# Altium PCB DAB_PCB.PcbDoc
Units mil, origin at the board's own origin, x right, y up, seen from the top; angles counter-clockwise.
Board outline 9448.82 x 7874.02 mil, 2 copper layers (Top Layer, Bottom Layer); 32 components, 34 nets, 127 pads, 0 vias.
Unrouted connection lines stored in the file: 12.
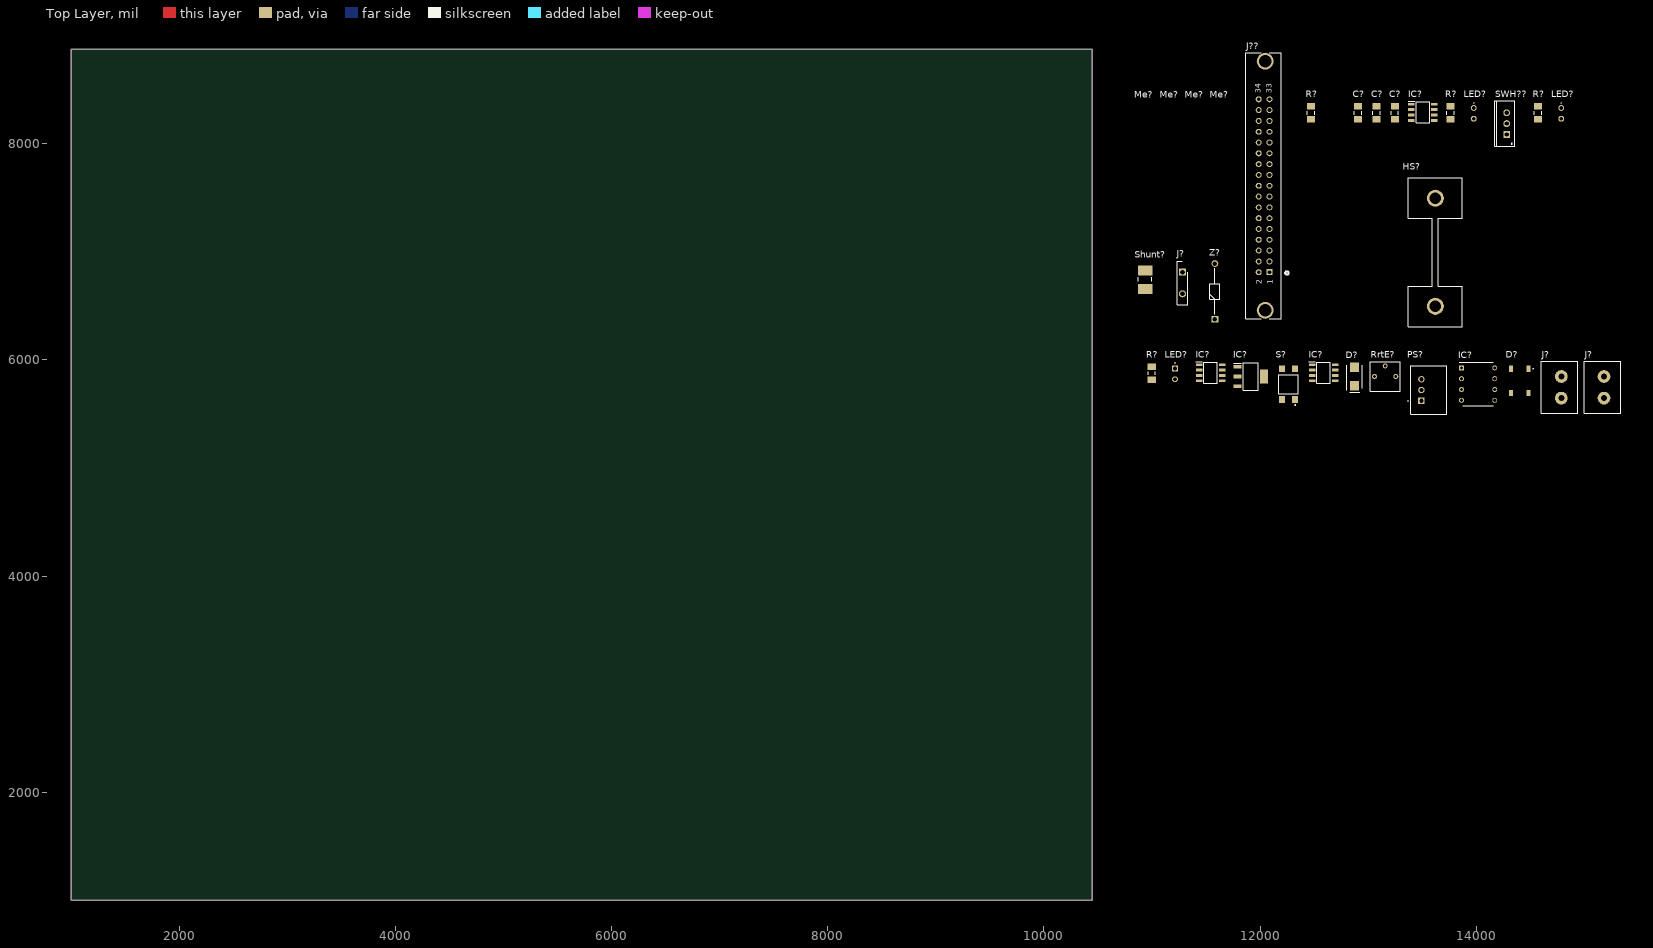
[diagram p0: Top Layer view]
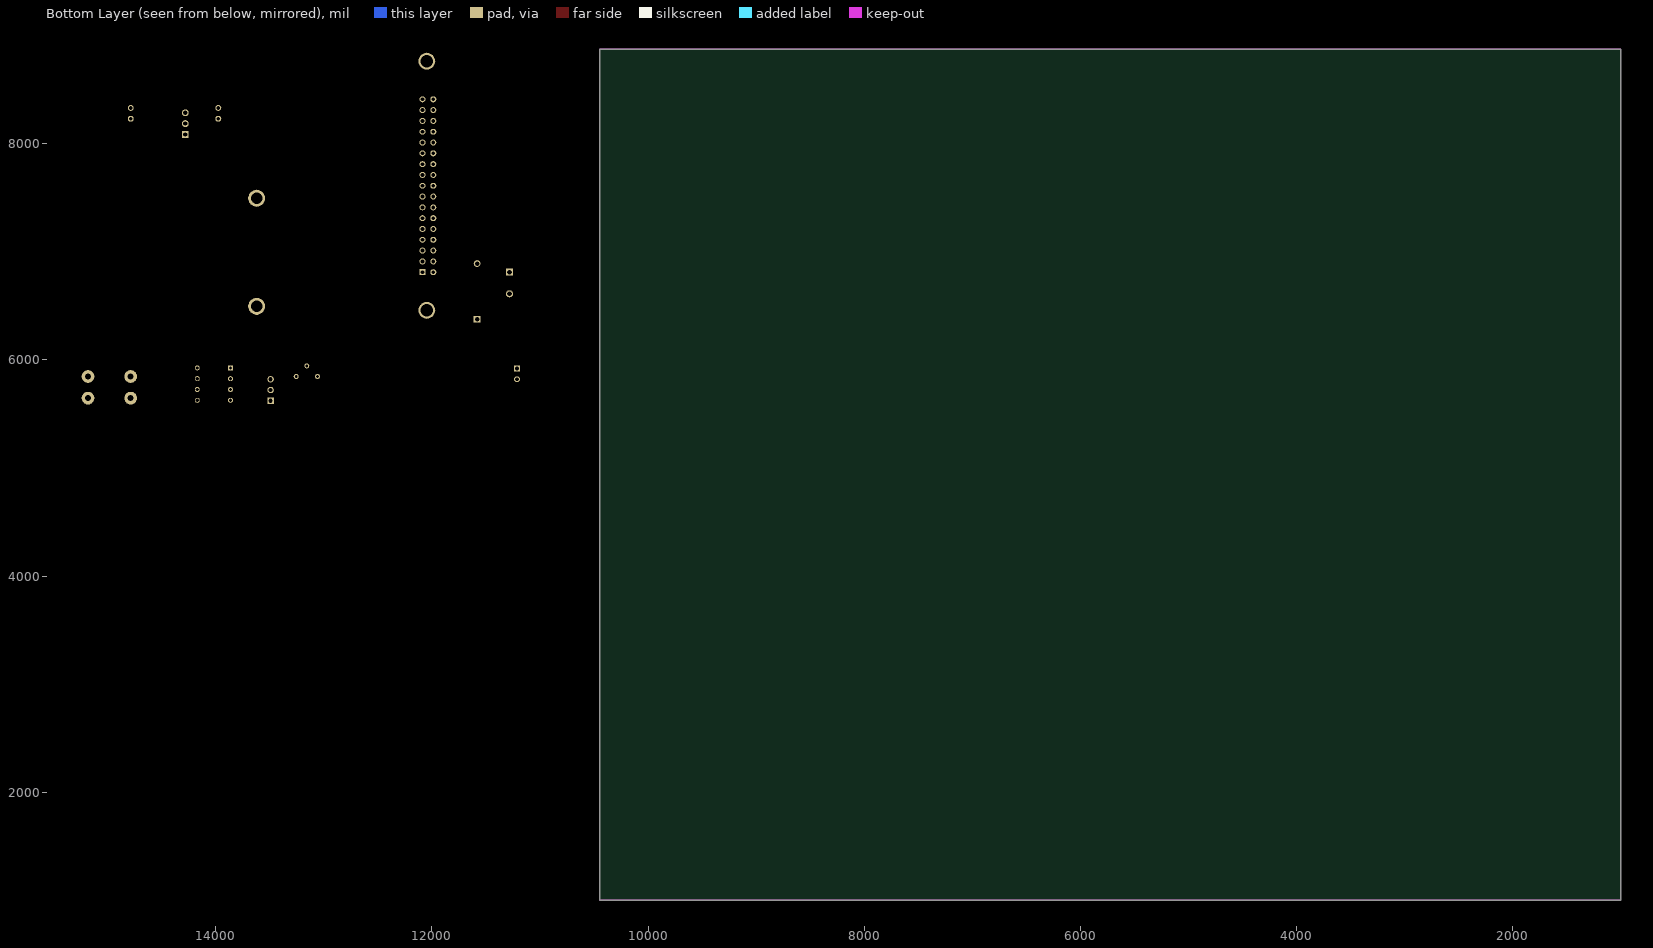
[diagram p1: Bottom Layer view, seen from below]

## Layer stack, top to bottom
Top Solder: solder mask 0.4, Solder Resist, Dk 3.5
Top Layer: signal copper 1.4
Dielectric 1: dielectric 12.6, FR-4, Dk 4.8
Bottom Layer: signal copper 1.4
Bottom Solder: solder mask 0.4, Solder Resist, Dk 3.5

## Board outline
1000,1000 1000,8874.02 10448.82,8874.02 10448.82,1000

## Design rules (kind name [scope] priority, off if disabled: settings)
BoardOutlineClearance [All] p1: gap=7.87 ignorepadtopadclearanceinfootprint=FALSE
Clearance [All] p1: gap=13.78 ignorepadtopadclearanceinfootprint=TRUE
ComponentClearance [All] p1: gap=5 collisioncheckmode=3 verticalgap=5 showdistances=TRUE
DiffPairsRouting [All] p1: maxlimit=10 minlimit=5 mostfreqgap=5 toplayer_minwidth=5 toplayer_maxwidth=1000 toplayer_prefwidth=5 bottomlayer_minwidth=5 bottomlayer_maxwidth=1000 bottomlayer_prefwidth=5 maxuncoupledlength=500
Height [All] p1: minheight=0 maxheight=71497.94 prefheight=500
HoleSize [All] p1: absolutevalues=TRUE maxlimit=248.03 minlimit=11.81 maxpercent=80.000 minpercent=20.000
HoleToHoleClearance [All] p1: gap=10 allowstackedmicrovias=FALSE
MinimumAnnularRing [All] p1: minimumring=6
MinimumSolderMaskSliver [All] p1: minsoldermaskwidth=6
PlaneClearance [All] p1: clearance=5
PlaneConnect PlaneConnectPowerPads [InPadClass('PowerPads')] p1: planeconnectstyle=Direct reliefexpansion=20 reliefentries=4 reliefconductorwidth=10 reliefairgap=10
PlaneConnect [All] p2: pad.planeconnectstyle=Relief pad.reliefexpansion=11.81 pad.reliefentries=4 pad.reliefconductorwidth=5 pad.reliefairgap=5 via.planeconnectstyle=Direct via.reliefexpansion=11.81 via.reliefentries=4 via.reliefconductorwidth=5 via.reliefairgap=5
PolygonConnect PolygonConnectPowerPads [All vs (InPadClass('PowerPads'))] p1: connectstyle=Direct reliefconductorwidth=10 reliefentries=4 polygonreliefangle="90 Angle" airgapwidth=10
PolygonConnect [All] p2: thpad.connectstyle=Relief thpad.reliefconductorwidth=5 thpad.reliefentries=4 thpad.polygonreliefangle="90 Angle" thpad.airgapwidth=5 smdpad.connectstyle=Relief smdpad.reliefconductorwidth=5 smdpad.reliefentries=4 smdpad.polygonreliefangle="90 Angle" smdpad.airgapwidth=5 via.connectstyle=Direct via.reliefconductorwidth=5 via.reliefentries=4 via.polygonreliefangle="90 Angle" via.airgapwidth=5
RoutingVias [All] p1: holewidth=11.81 width=23.62 viastyle="Through Hole" minholewidth=11.81 minwidth=23.62 maxholewidth=23.62 maxwidth=259.84
SilkToSilkClearance [All] p1: silktosilkclearance=5
SilkToSolderMaskClearance [IsPad] p1: minsilkscreentomaskgap=5 clearancetoexposedcopper=TRUE
SolderMaskExpansion [All] p1: expansion=2 istentingtop=FALSE
UnRoutedNet [All] p1: checkbadconnections=TRUE
Width [All] p1: maxlimit=1000 minlimit=10 preferedwidth=10 minimp=50.000000 maximp=50.000000 favimp=50.000000
19 further rules are at their usual default settings.

## Classes and differential pairs
component class DAB_Schematic: C? D? HS? IC? J? J?? LED? Me? PS? R? RrtE? S? Shunt? SWH?? Tr? Z?

## Components (designator, comment, footprint, x,y, rotation, side; value= is the part's Value field where it differs from the comment)
C? "Put Value Here!" SM/1206 13247.28,8287.17 r90 top
C? "1uF" SM/1206 13077.28,8287.17 r90 top
C? "1uF" SM/1206 12907.28,8287.17 r90 top
D? "ES2C" DIOM5436X244N 12872.99,5846.73 r90 top
D? "LMB14S-TP" LMB14STP 14402.99,5806.73 r0 top
HS? "Heatsink" "Heatsink EA-T220" 13622.28,6496.54 r90 top
IC? "MCP6241-E_P" DIP781W56P254L950H533Q8N 14017.99,5776.73 r0 top
IC? "INA201AID" SOIC127P600X175-8N 12587.99,5881.73 r0 top
IC? "AZ1117IH-3.3TRG1" SOT230P700X180-4N 11912.99,5846.73 r0 top
IC? "UCC27288DR" SOIC127P600X175-8N 13507.28,8292.17 r0 top
IC? "UA78L12ACDR" SOIC127P600X175-8N 11542.99,5881.73 r0 top
J? "test point" "test point" 11282.28,6812.17 r90 top
J? "" "PHOENIX  1755736" 15182.99,5846.73 r90 top
J? "" "PHOENIX  1755736" 14787.99,5846.73 r90 top
J?? "N3431-6302RB" 3M_N3431-6302RB 11987.28,8412.17 r90 top
LED? "WP710A10LGD" WP710A10LGD 14787.28,8332.17 r0 top
LED? "WP710A10LID" WP710A10LID 11212.99,5921.73 r0 top
LED? "WP710A10LGD" WP710A10LGD 13977.28,8332.17 r0 top
Me? "M3-Hole" M3 11132.28,8327.17 r0 top
Me? "M3-Hole" M3 11362.28,8327.17 r0 top
Me? "M3-Hole" M3 11592.28,8327.17 r0 top
Me? "M3-Hole" M3 10897.28,8327.17 r0 top
PS? "173951275" 173951275 13492.99,5621.73 r90 top
R? "Put Value here!" SM/1206 14572.28,8287.17 r90 top
R? "Put Value here!" SM/1206 12472.28,8287.17 r90 top
R? "Put Value here!" SM/1206 13762.28,8287.17 r90 top
R? "Put Value here!" SM/1206 10997.99,5876.73 r90 top
RrtE? "Variable Resistor" "TRIMMER CT-6EP" 13157.99,5846.73 r0 top
S? "TL3305BF100QG" TL3305BF160QG 12262.99,5776.73 r90 top
Shunt? "Put Value Here!" CSNL2512FT5L00 10937.28,6742.17 r90 top
SWH?? "Put MOSFET Part Number Here!" TO-220AB 14282.28,8187.17 r90 top
Z? "1N4750A-TR" DIOAD1310W86L370D235 11582.28,6376.42 r90 top

## Footprints (in the part's own frame and the unit in brackets; to place one, negate y for a bottom-side part, rotate by r counter-clockwise, add the part's x,y. Pads: shape width x height; smd on the part's side, far side on the other; paste and mask are expansions set on the pad)
3M_N3431-6302RB [mil]
  rect 55x55 hole 35 mask+4.02: 1(-1600,-100)
  round 55 hole 35 mask+4.02: 2(-1600,0) 3(-1500,-100) 4(-1500,0) 5(-1400,-100) 6(-1400,0) 7(-1300,-100) 8(-1300,0) 9(-1200,-100) 10(-1200,0) 11(-1100,-100) 12(-1100,0) 13(-1000,-100) 14(-1000,0) 15(-900,-100) 16(-900,0) 17(-800,-100) 18(-800,0) 19(-700,-100) 20(-700,0) 21(-600,-100) 22(-600,0) 23(-500,-100) 24(-500,0) 25(-400,-100) 26(-400,0) 27(-300,-100) 28(-300,0) 29(-200,-100) 30(-200,0) 31(-100,-100) 32(-100,0) 33(0,-100) 34(0,0)
  round 156 hole 116 mask+4.02: 35(-1953,-60) 36(353,-60)
  silkscreen extent -2032,-276 432,120, body extent -2030,-215 430,125, height 1069
173951275 [mm]
  rect 1.5x1.5 hole 1: 1(0,0)
  round 1.5 hole 1: 2(2.54,0) 3(5.08,0)
  silkscreen extent -3.21,-6 8.29,3.2, body extent -3.21,-6.5 8.29,2.5, height 17.5
CSNL2512FT5L00 [mm]
  rect 2.38x3.4 smd: 1(-2.21,0) 2(2.21,0)
  silkscreen extent -0.3,-1.59 0.6,1.59, body extent -3.17,-1.59 3.18,1.59, height 0.35
DIOAD1310W86L370D235 [mm]
  rect 1.575x1.575 hole 1.05: 1(0,0)
  round 1.575 hole 1.05: 2(13.1,0)
  silkscreen extent 1.14,-1.17 11.96,1.17, body extent -0.43,-1.29 13.53,1.29, height 2.6
DIOM5436X244N [mm]
  rect 2.2x2.15 smd: 1(-2.2,0) 2(2.2,0)
  silkscreen extent -3.68,-1.81 2.7,1.81, body extent -2.7,-1.81 2.7,1.81, height 2.31
DIP781W56P254L950H533Q8N [mm]
  rect 1.159x1.159 hole 0.759: 1(-3.905,3.81)
  round 1.159 hole 0.759: 2(-3.905,1.27) 3(-3.905,-1.27) 4(-3.905,-3.81) 5(3.905,-3.81) 6(3.905,-1.27) 7(3.905,1.27) 8(3.905,3.81)
  silkscreen extent -4.48,-5.08 3.56,5.08, body extent -4.05,-4.75 4.05,4.75, height 5.33
"Heatsink EA-T220" [mm]
  round 4.005 hole 2.67: 1(0,0) 2(25.4,0)
  silkscreen extent -4.8,-6.35 30.2,6.35, body extent -4.8,-6.35 30.2,6.35, height 38.45
LMB14STP [mm]
  rect 0.9x1.5 smd: 1(2.05,2.86) 2(2.05,-2.86) 3(-2.05,-2.86) 4(-2.05,2.86)
  silkscreen extent 3.1,2.81 3.2,2.91
M3 [mil] "M3 - Hole"
  round 60 hole 129.92: ""(0,0)
"PHOENIX  1755736" [mm]
  round 3 hole 1.4: 1(0,0) 2(-5.08,0)
  silkscreen extent -8.62,-3.9 3.54,4.7, body extent -8.64,-3.92 3.52,4.68, height 12.01
SM/1206 [mm]
  rect 1.5x1.9 smd: 1(-1.55,0) 2(1.55,0)
  silkscreen extent -0.4,-0.85 0.4,0.85, body extent -1.68,-0.87 1.68,0.87, height 0.71
SOIC127P600X175-8N [mm]
  rect 1.525x0.65 smd: 1(-2.712,1.905) 2(-2.712,0.635) 3(-2.712,-0.635) 4(-2.712,-1.905) 5(2.712,-1.905) 6(2.712,-0.635) 7(2.712,0.635) 8(2.712,1.905)
  silkscreen extent -3.47,-2.45 1.6,2.58, body extent -3,-2.45 3,2.45, height 1.75
SOT230P700X180-4N [mm]
  rect 1.85x0.9 smd: 1(-3.1,2.3) 2(-3.1,0) 3(-3.1,-2.3)
  rect 1.85x3.2 smd: 4(3.1,0)
  silkscreen extent -4.03,-3.25 1.75,3.25, body extent -3.5,-3.25 3.5,3.25, height 1.8
"test point" [mm]
  rect 1.65x1.65 hole 1.1: 1(0,0)
  round 1.65 hole 1.1: 2(-5.08,0)
  silkscreen extent -7.62,-1.27 2.54,1.27, body extent -7.62,-1.27 2.54,1.27, height 8.38
TL3305BF160QG [mm]
  rect 1.6x1.4 smd: 1(-3.6,-1.5) 2(3.6,-1.5) 3(-3.6,1.5) 4(3.6,1.5)
  silkscreen extent -5,-2.25 2.25,2.25, body extent -3.75,-2.25 3.75,2.25, height 4.9
TO-220AB [mm]
  rect 1.6x1.6 hole 1: 1(-2.54,0)
  round 1.6 hole 1: 2(0,0) 3(2.54,0)
  silkscreen extent -5.35,-1.85 5.35,2.85, body extent -5.4,-1.9 5.4,2.9, height 19.3
"TRIMMER CT-6EP" [mm]
  round 1.15 hole 0.65: 1(-2.5,0) 2(0,2.5) 3(2.5,0)
  silkscreen extent -3.5,-3.5 3.5,3.5
WP710A10LGD [mm]
  round 1.4 hole 0.9: 1(0,0) 2(0,-2.54)
  silkscreen extent -0.05,1.13 0.05,1.23, body extent -1.6,-2.89 1.6,0.35, height 6
WP710A10LID [mm]
  rect 1.4x1.4 hole 0.9: 1(0,0)
  round 1.4 hole 0.9: 2(0,-2.54)
  silkscreen extent -0.05,1.2 0.05,1.3, body extent -1.6,-2.89 1.6,0.35, height 6

## Part data
C? C? C?: library part "Capacitor (SMD)", "Capacitor (non polarized)"
D?: library part "Schottky Diode", "Schottky Diode"
D?: "Schottky Diode", Manufacturer_Name=MCC, Mouser Part Number=833-LMB14S-TP, Arrow Part Number=LMB14S-TP, Arrow Price/Stock=https://www.arrow.com/en/products/lmb14s-tp/micro-commercial-components, Datasheet Link=https://www.mccsemi.com/pdf/Products/LMB12S-LMB110S(LMBS-1).pdf, Height=1.71mm, Manufacturer_Part_Number=LMB14S-TP, Mouser Price/Stock=https://www.mouser.co.uk/ProductDetail/Micro-Commercial-Components-MCC/LMB14S-TP?qs=P1JMDcb91o681gFxLNJ1UQ%3D%3D
HS?: "HEATSINK TO-218,TO-220,TO-247"
IC?: "Integrated Circuit", Arrow Part Number=MCP6241-E/P, Manufacturer_Name=Microchip, Mouser Part Number=579-MCP6241-E/P, Arrow Price/Stock=https://www.arrow.com/en/products/mcp6241-ep/microchip-technology?utm_currency=USD&region=nac, Datasheet Link=http://ww1.microchip.com/downloads/en/DeviceDoc/21882d.pdf, Height=5.334mm, Manufacturer_Part_Number=MCP6241-E/P, Mouser Price/Stock=https://www.mouser.co.uk/ProductDetail/Microchip-Technology/MCP6241-E-P?qs=g6BBfX6YTkkJAE8LlpYY9A%3D%3D
IC?: "Integrated Circuit", Manufacturer_Name="Texas Instruments", Mouser Part Number=595-INA201AID, Arrow Part Number=INA201AID, Arrow Price/Stock=https://www.arrow.com/en/products/ina201aid/texas-instruments?utm_currency=USD&region=nac, Datasheet Link=http://www.ti.com/lit/gpn/INA201, Height=1.75mm, Manufacturer_Part_Number=INA201AID, Mouser Price/Stock=https://www.mouser.co.uk/ProductDetail/Texas-Instruments/INA201AID?qs=wkx8pu8tL7JUWgtgkwU%252B9A%3D%3D
IC?: "Integrated Circuit", Manufacturer_Name="Diodes Incorporated", Mouser Part Number=621-AZ1117IH-3.3TRG1, Arrow Part Number=AZ1117IH-3.3TRG1, Arrow Price/Stock=https://www.arrow.com/en/products/az1117ih-3.3trg1/diodes-incorporated?utm_currency=USD&region=europe, Datasheet Link=https://www.diodes.com//assets/Datasheets/AZ1117I.pdf, Height=1.8mm, Manufacturer_Part_Number=AZ1117IH-3.3TRG1, Mouser Price/Stock=https://www.mouser.co.uk/ProductDetail/Diodes-Incorporated/AZ1117IH-3.3TRG1?qs=cpo3%2FpBou2jnS4SxLgAVoA%3D%3D
IC?: "Integrated Circuit", Manufacturer_Name="Texas Instruments", Mouser Part Number=595-UCC27288DR, Arrow Part Number=UCC27288DR, Arrow Price/Stock=https://www.arrow.com/en/products/ucc27288dr/texas-instruments?utm_currency=USD&region=europe, Datasheet Link=https://www.arrow.com/en/products/ucc27288dr/texas-instruments, Height=1.75mm, Manufacturer_Part_Number=UCC27288DR, Mouser Price/Stock=https://www.mouser.co.uk/ProductDetail/Texas-Instruments/UCC27288DR?qs=zW32dvEIR3s81MTqTT5v9Q%3D%3D
IC?: "Integrated Circuit", Manufacturer_Name="Texas Instruments", Mouser Part Number=595-UA78L12ACDR, Arrow Part Number=UA78L12ACDR, Arrow Price/Stock=https://www.arrow.com/en/products/ua78l12acdr/texas-instruments?region=nac, Datasheet Link=http://www.ti.com/lit/gpn/ua78l, Height=1.75mm, Manufacturer_Part_Number=UA78L12ACDR, Mouser Price/Stock=https://www.mouser.co.uk/ProductDetail/Texas-Instruments/UA78L12ACDR?qs=0O%2FZFlpUpJW5pw3BJ01ZLg%3D%3D
J?: library part TSW-202-07-T-S, "Connector", Manufacturer_Name=SAMTEC, Mouser Part Number=200-TSW20207TS, Arrow Part Number=TSW-202-07-T-S, Arrow Price/Stock=https://www.arrow.com/en/products/tsw-202-07-t-s/samtec?utm_currency=USD&region=europe, Datasheet Link=http://suddendocs.samtec.com/catalog_english/tsw_th.pdf, Height=8.38mm, Manufacturer_Part_Number=TSW-202-07-T-S, Mouser Price/Stock=https://www.mouser.co.uk/ProductDetail/Samtec/TSW-202-07-T-S?qs=rU5fayqh%252BE1T8HlkVOHZPg%3D%3D
J? J?: library part Phoenix-1755736, "Connector 2 pos"
J??: "Connector", Manufacturer_Name=Hirose, Manufacturer_Part_Number=HIF3FC-34PA-2.54DS(71), Mouser Part Number=798-HIF3FC34PA254DS1, Datasheet Link=http://uk.rs-online.com/web/p/products/8961111, Height=8.5mm, Mouser Price/Stock=https://www.mouser.co.uk/ProductDetail/Hirose-Connector/HIF3FC-34PA-2.54DS71?qs=eDUdFcBPps12jUkdM6VM2w%3D%3D
LED? LED?: "LED", Manufacturer_Name=Kingbright, Mouser Part Number=604-WP710A10LGD, Arrow Part Number=WP710A10LGD, Arrow Price/Stock=https://www.arrow.com/en/products/wp710a10lgd/kingbright?region=nac, Datasheet Link=https://www.kingbrightusa.com/images/catalog/SPEC/WP710A10LGD.pdf, Height=5.9mm, Manufacturer_Part_Number=WP710A10LGD, Mouser Price/Stock=https://www.mouser.com/Search/Refine.aspx?Keyword=604-WP710A10LGD
LED?: "LED", Manufacturer_Name=Kingbright, Mouser Part Number=604-WP710A10LID, Arrow Part Number=WP710A10LID, Arrow Price/Stock=https://www.arrow.com/en/products/wp710a10lid/kingbright?utm_currency=USD&region=nac, Datasheet Link=https://www.kingbrightusa.com/images/catalog/SPEC/WP710A10LID.pdf, Height=5.9mm, Manufacturer_Part_Number=WP710A10LID, Mouser Price/Stock=https://www.mouser.co.uk/ProductDetail/Kingbright/WP710A10LID?qs=jBF9H7RTBaSn1LemoiEgcA%3D%3D
PS?: "Power Supply", Manufacturer_Name="Wurth Elektronik", Datasheet Link=https://www.we-online.com/components/products/datasheet/173951275.pdf, Height=18mm, Manufacturer_Part_Number=173951275
R? R? R? R?: library part "Resistor (SMD)", "Resistor (Surface Mounted)"
S?: "Switch", Manufacturer_Name=E-Switch, Mouser Part Number=612-TL3305BF100QG, Datasheet Link=https://configured-product-images.s3.amazonaws.com/2D/specs/TL3305BF100QG.pdf, Manufacturer_Part_Number=TL3305BF100QG, Mouser Price/Stock=https://www.mouser.co.uk/ProductDetail/E-Switch/TL3305BF100QG?qs=IKkN%2F947nfDIPwqPQja%252BvQ%3D%3D
Shunt?: library part ShuntResistor, "Shunt Resistor", Arrow Part Number=CSNL2512FT5L00, Manufacturer_Name="Stackpole Electronics", Arrow Price/Stock=https://www.arrow.com/en/products/csnl2512ft5l00/stackpole-electronics, Datasheet Link=https://cs.seielect.com/catalog/SEI-CSNL.pdf, Height=0.55mm, Manufacturer_Part_Number=CSNL2512FT5L00
SWH??: library part NMOS-2, "N-Channel Power MOSFET"
Z?: "Zener Diode", Manufacturer_Name=Vishay, Mouser Part Number=78-1N4750A, Arrow Part Number=1N4750A-TR, Arrow Price/Stock=https://www.arrow.com/en/products/1n4750a-tr/vishay?region=nac, Datasheet Link=http://www.vishay.com/docs/85816/1n4728a.pdf, Manufacturer_Part_Number=1N4750A-TR, Mouser Price/Stock=https://www.mouser.co.uk/ProductDetail/Vishay-Semiconductors/1N4750A-TR?qs=TNTIDjy6APqxkqc3HzV0eA%3D%3D

## Nets (pads, with @x,y where several pads share a name; then routed paths per layer and width w, separated by ;. In a path a pad name is that pad's centre, name@x,y a point inside that pad or via, vN(x,y) a via of type N, cw(c..) or ccw(c..) an arc to the next point about the centre after c; other vN are vias at no path point)
ADCA0: J??.5
ADCA1: J??.7
ADCA2: J??.9
ADCA3: J??.11
ADCA4: J??.13
ADCA5: J??.15
CS1_ISO: J??.8 R?.2@14572.28,8348.19
CS2_ISO: J??.10 R?.2@13762.28,8348.19
ECAP2_ISO: J??.6
ECAP5_ISO: J??.19
GND: C?.1@12907.28,8226.14 C?.2@13077.28,8348.19 J??.33 J??.34 LED?.1
GPIO14_ISO: J??.3
GPIO15_ISO: J??.4 R?.2@10997.99,5937.76
GPIO16_ISO: J??.17
NetC?_1: C?.1@13077.28,8226.14 J??.2
NetC?_2: C?.2@12907.28,8348.19 J??.1
NetLED?_2: LED?.2@14787.28,8232.17 R?.1@14572.28,8226.14
PWM1A_ISO: J??.21
PWM1B_ISO: J??.22
PWM2A_ISO: J??.23
PWM2B_ISO: J??.24
PWM3A_ISO: J??.25
PWM3B_ISO: J??.26
PWM4A_ISO: J??.27
PWM4B_ISO: J??.28
PWM5A_ISO: J??.29
PWM5B_ISO: J??.30
PWM6A_ISO: J??.31
PWM6B_ISO: J??.32
PWMSYNCI_ISO: J??.14
PWMSYNCO_ISO: J??.12
SPICLK_ISO: J??.20
SPIMISO_ISO: J??.18
SPIMOSI_ISO: J??.16
pads on no net: C?.1@13247.28,8226.14 C?.2@13247.28,8348.19 D?.1 D?.2 D?.3 D?.4 HS?.1 HS?.2 IC?.1 IC?.2 IC?.3 IC?.4 IC?.5 IC?.6 IC?.7 IC?.8 J?.1 J?.2 J??.35 J??.36 LED?.2@11212.99,5821.73 LED?.2@13977.28,8232.17 Me?. PS?.1 PS?.2 PS?.3 R?.1@10997.99,5815.71 R?.1@12472.28,8226.14 R?.1@13762.28,8226.14 R?.2@12472.28,8348.19 RrtE?.1 RrtE?.2 RrtE?.3 S?.1 S?.2 S?.3 S?.4 Shunt?.1 Shunt?.2 SWH??.1 SWH??.2 SWH??.3 Z?.1 Z?.2

## Keep-outs
Keep-Out Layer:
  the board outline again, w10

## Silkscreen, mask and mechanical layers (free items; w line width, h text height)
Mechanical 1:
  text "The PCB dimensions must not exceed 200mm × 240mm. /  / Try your best to have a compact design!" at 962.6,9313.98 h200

## Dimensions
10448.82,1000 to 10448.82,8874.02 on Mechanical 1
1000,8874.02 to 10448.82,8874.02 on Mechanical 1

## Text inside footprints (layer, text, board x,y; h text height)
J??: Top Overlay "1" at 12116.34,6700.42 h50.02 r90; Top Overlay "2" at 12016.3,6699.97 h50.03 r90; Top Overlay "33" at 12108.35,8467.2 h50.03 r90; Top Overlay "34" at 12008.3,8467.21 h50.04 r90; Mechanical 13 "1" at 12116.51,6698.1 h50.09 r90; Mechanical 13 "2" at 12016.29,6700.63 h50.02 r90; Mechanical 13 "33" at 12108.49,8467.26 h50.09 r90; Mechanical 13 "34" at 12008.3,8467.21 h50.04 r90